# Altium PCB PCB3 - kopia.PcbDoc
Units mm, origin at the board's own origin, x right, y up, seen from the top; angles counter-clockwise.
Board outline 66 x 100 mm, 4 copper layers (Top Layer, Int1 (GND), Int2 (PWR), Bottom Layer), stack 1.369 mm thick; 75 components, 64 nets, 288 pads, 183 vias.
Unrouted connection lines stored in the file: 38.
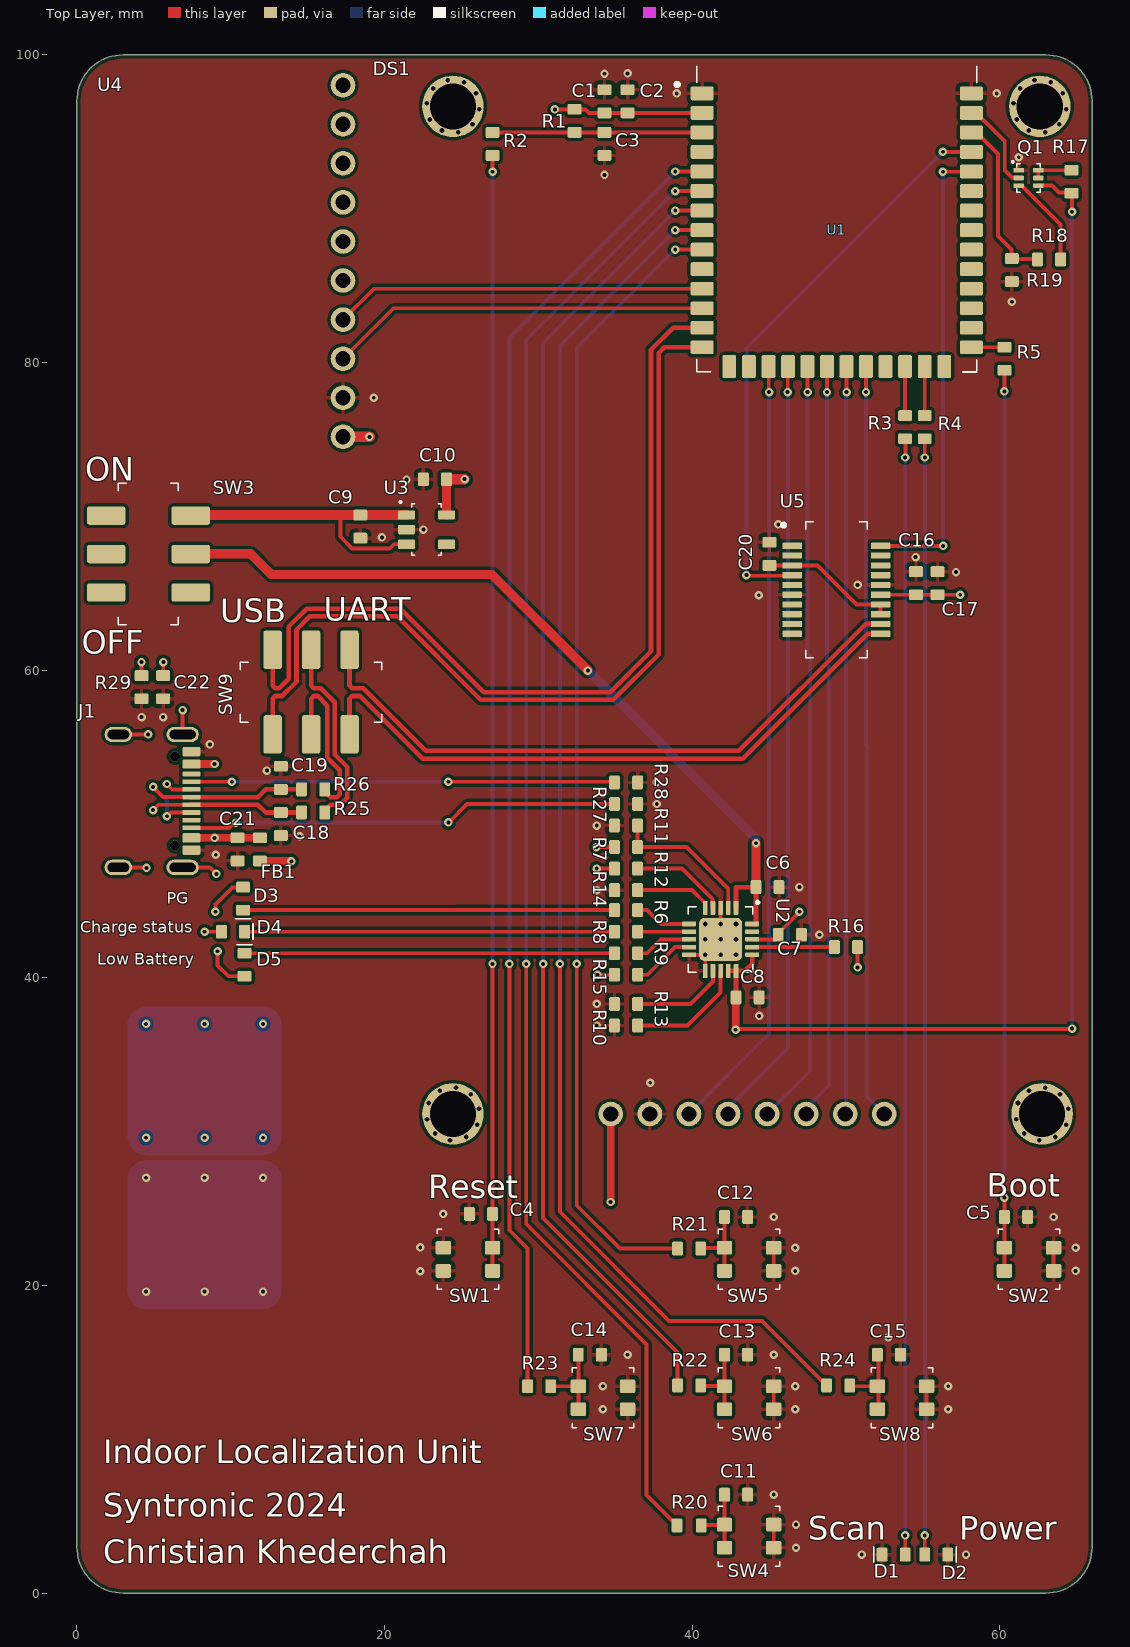
[diagram p0: Top Layer view]
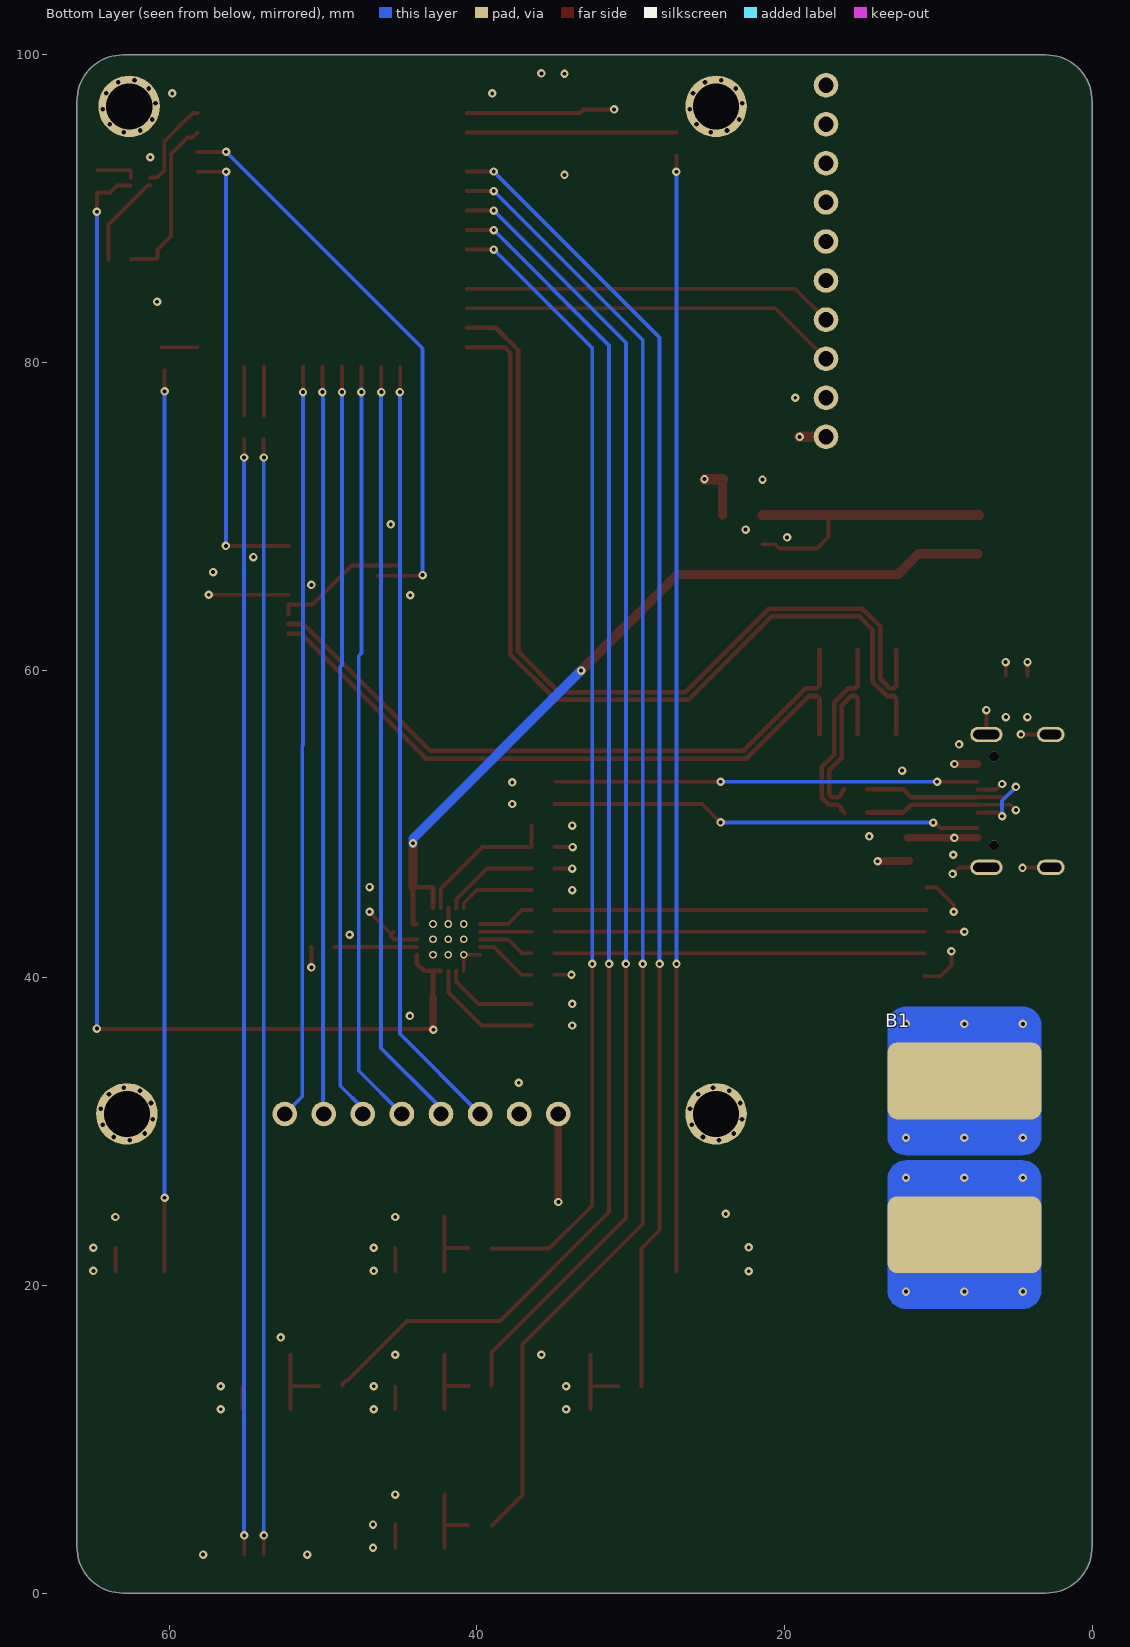
[diagram p1: Bottom Layer view, seen from below]
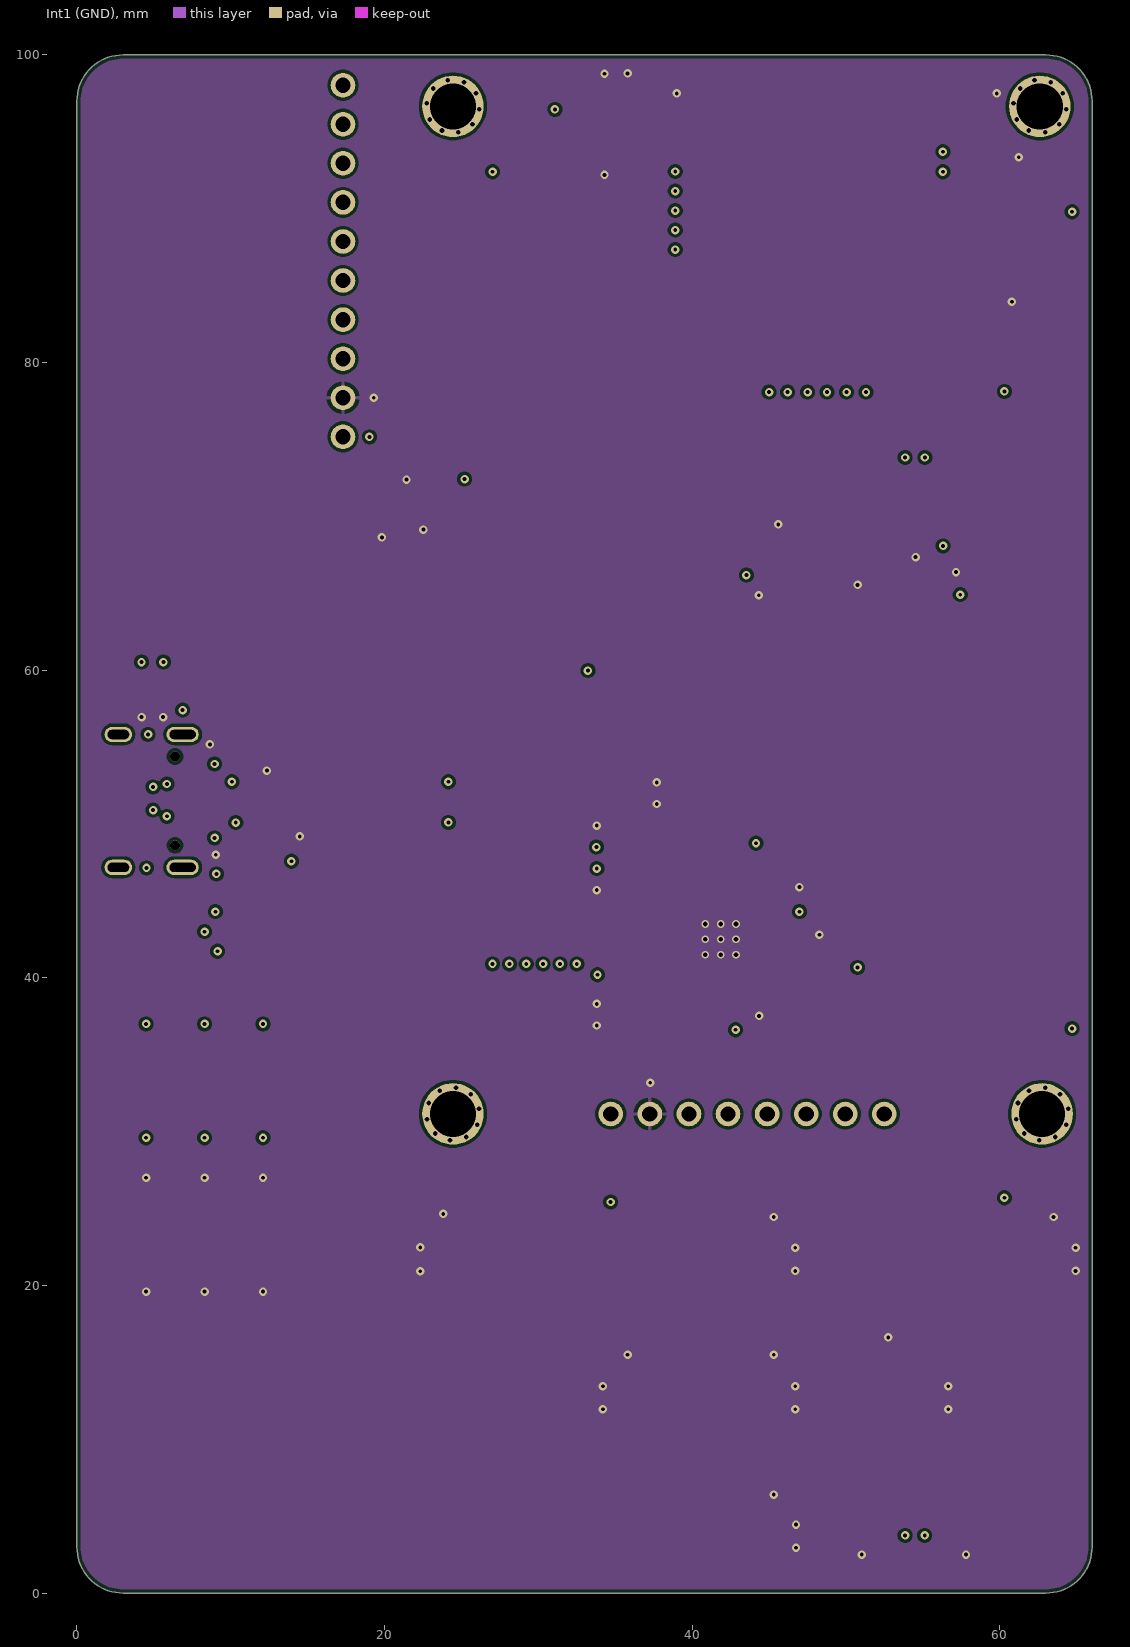
[diagram p2: Int1 (GND)]
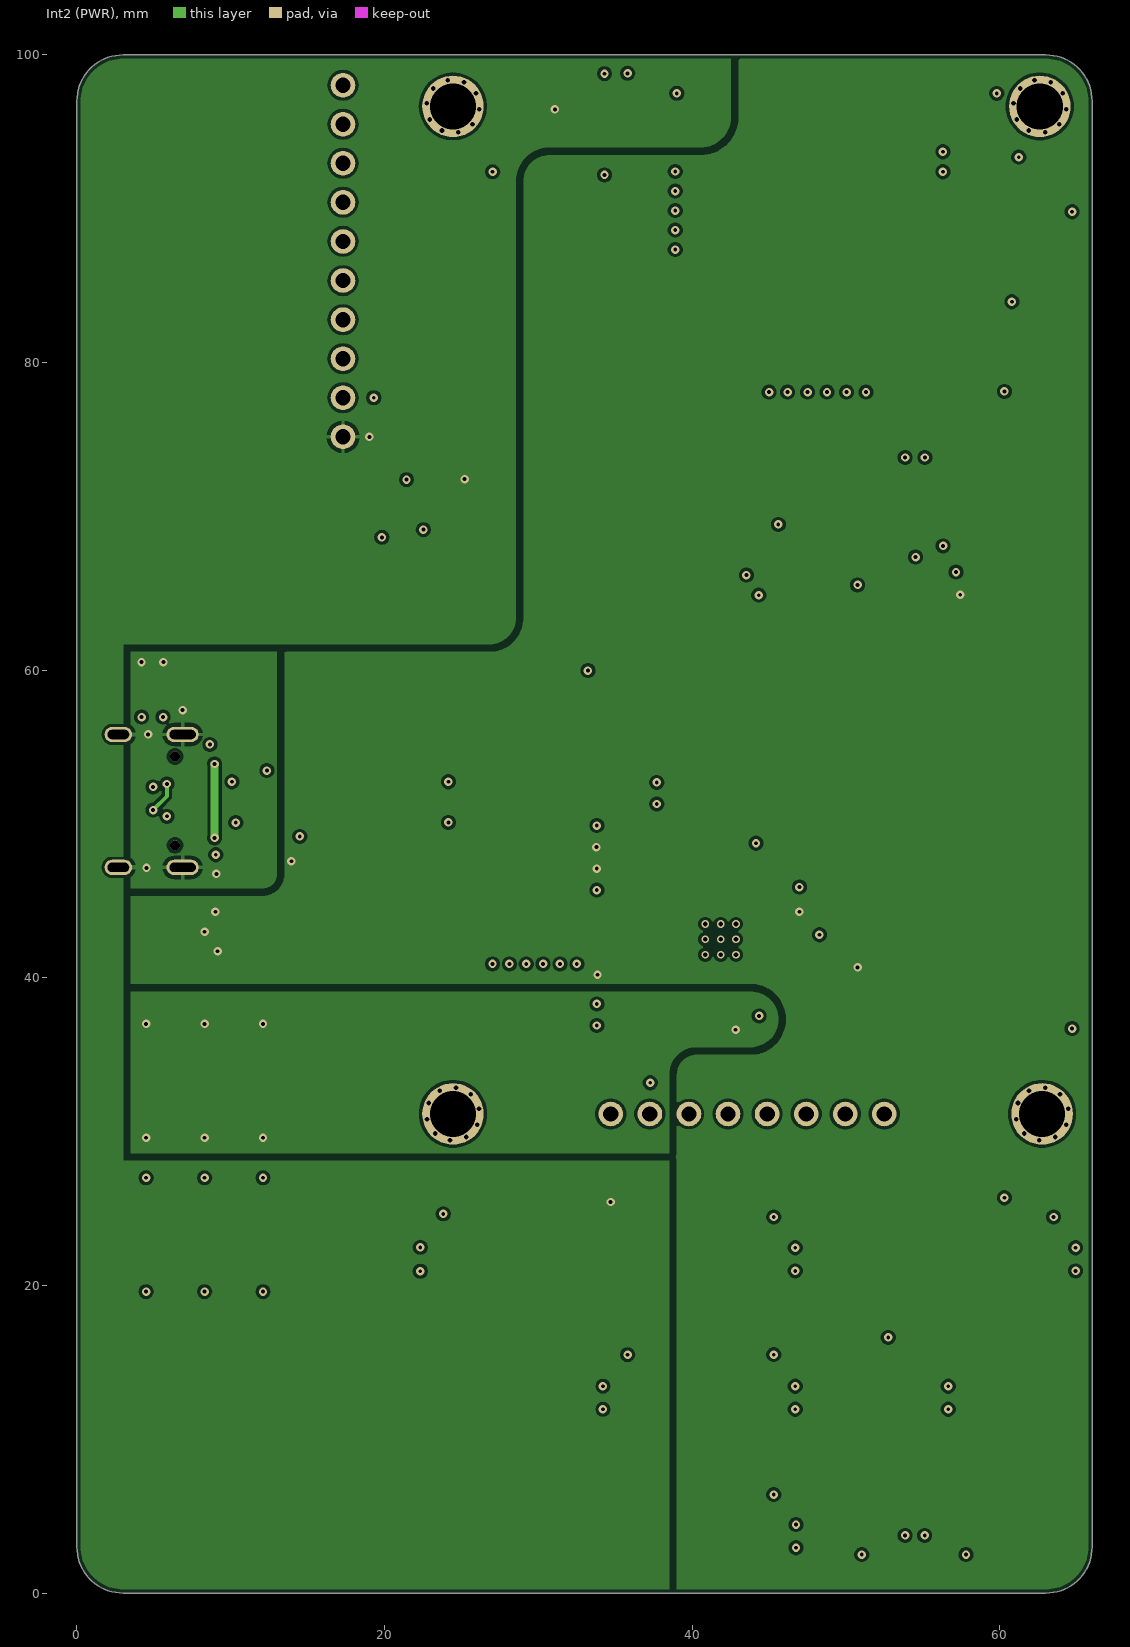
[diagram p3: Int2 (PWR)]
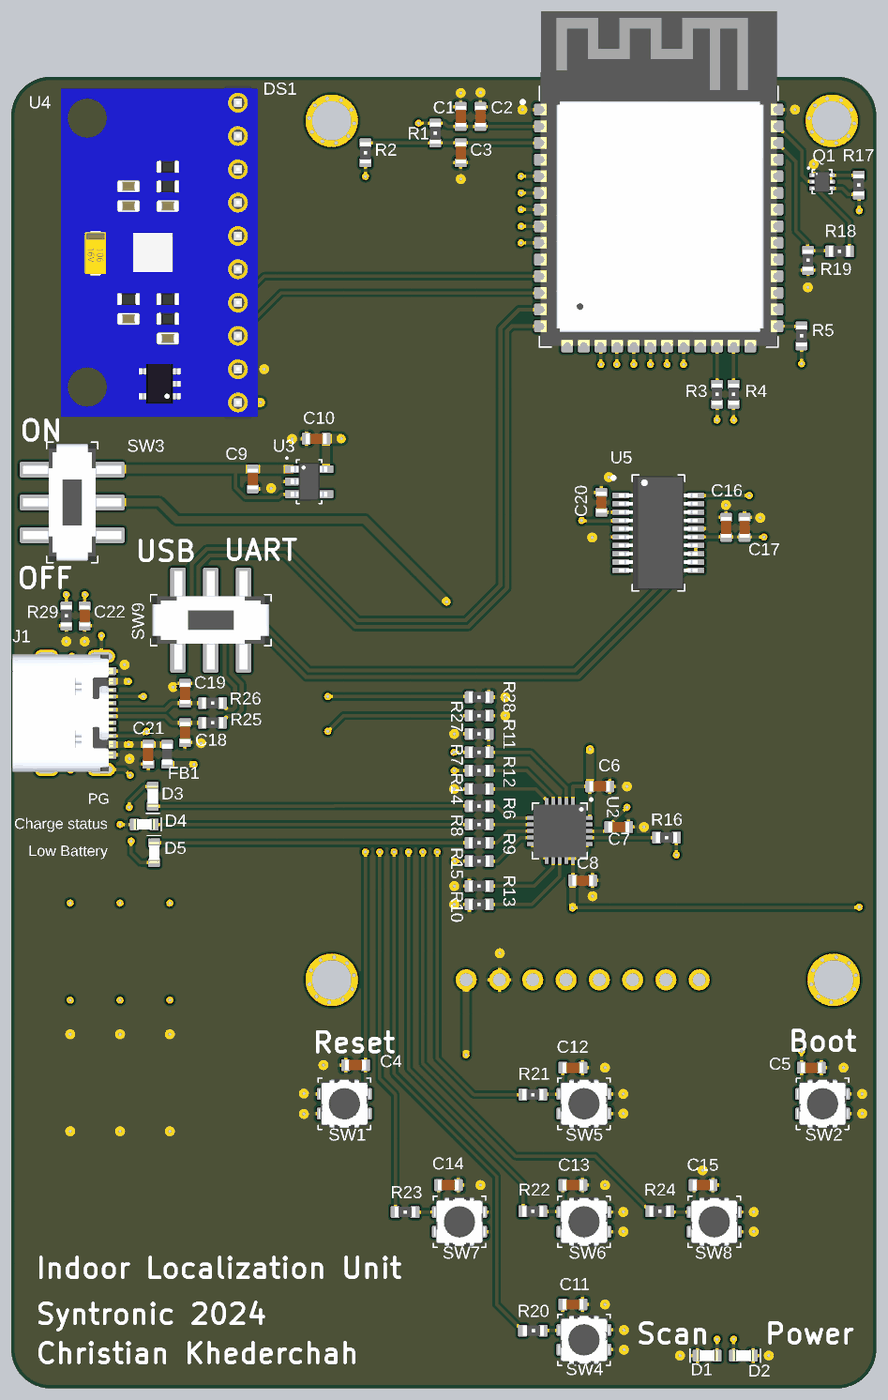
[diagram p4: 3D render of the assembled board from above, using the file's embedded part models]

## Layer stack, top to bottom
Top Solder: solder mask 0.025, SM-001, Dk 4
Top Layer: signal copper 0.035
Dielectric 1: prepreg 0.1295, PP-017, Dk 4.3
Dielectric 2: prepreg 0.1295, PP-017, Dk 4.3
Int1 (GND): signal copper 0.035
Dielectric 3: core 0.7112, Core-039, Dk 4.8
Int2 (PWR): signal copper 0.035
Dielectric 4: prepreg 0.1295, PP-017, Dk 4.3
Dielectric 5: prepreg 0.1295, PP-017, Dk 4.3
Bottom Layer: signal copper 0.035
Bottom Solder: solder mask 0.025, SM-001, Dk 4

## Board outline
0,3 0,97 cw(c3,97) 3,100 63,100 cw(c63,97) 66,97 66,3 cw(c63,3) 63,0 3,0 cw(c3,3)

## Design rules (kind name [scope] priority, off if disabled: settings)
BoardOutlineClearance [All] p1: gap=0.25 ignorepadtopadclearanceinfootprint=FALSE except(0: Arc-SplitContinuation Track-SplitContinuation SMDPad-SplitContinuation THPad-SplitContinuation Via-SplitContinuation Fill-SplitContinuation Poly-SplitContinuation Region-SplitContinuation Text-SplitContinuation)
Clearance [All] p1: gap=0.2 ignorepadtopadclearanceinfootprint=FALSE except(0.5: Fill-Fill Fill-Poly Fill-Region Poly-Poly Poly-Region Region-Region)
DiffPairsRouting [All] p1: maxlimit=0.2 minlimit=0.127 mostfreqgap=0.2 toplayer_mingap=0.2 toplayer_minwidth=0.3 toplayer_maxwidth=0.3 toplayer_prefwidth=0.3 midlayer1_maxgap=0.127 midlayer1_prefgap=0.127 midlayer1_minwidth=0.113 midlayer1_maxwidth=0.113 midlayer1_prefwidth=0.113 midlayer2_maxgap=0.127 midlayer2_prefgap=0.127 midlayer2_minwidth=0.113 midlayer2_maxwidth=0.113 midlayer2_prefwidth=0.113 bottomlayer_mingap=0.2 bottomlayer_minwidth=0.3 bottomlayer_maxwidth=0.3 bottomlayer_prefwidth=0.3 impedanceprofiledriven=TRUE impedanceprofileid={8352E104-22B4-4ABE-B9B5-B5B13E8F82C1} impedanceprofilevalue=90.000000 maxuncoupledlength=12.7
MatchedLengths MatchedLengths_USB_DiffPairs [All] p1: tolerance=0.127 checknetsindiffpair=TRUE checkdiffpairvsdiffpair=FALSE checkxsignals=FALSE checkothers=FALSE
PolygonConnect [All] p1: thpad.connectstyle=Relief thpad.reliefconductorwidth=0.254 thpad.reliefentries=4 thpad.polygonreliefangle="90 Angle" thpad.airgapwidth=0.254 smdpad.connectstyle=Relief smdpad.reliefconductorwidth=0.254 smdpad.reliefentries=4 smdpad.polygonreliefangle="90 Angle" smdpad.airgapwidth=0.254 via.connectstyle=Direct via.reliefconductorwidth=0.254 via.reliefentries=4 via.polygonreliefangle="90 Angle" via.airgapwidth=0.254
RoutingVias [All] p1: holewidth=0.25 width=0.55 viastyle="Through Hole" minholewidth=0.25 minwidth=0.55 maxholewidth=0.25 maxwidth=0.55
SolderMaskExpansion [All] p1: expansion=0.102 istentingtop=FALSE
Width [All] p1: maxlimit=1 minlimit=0.25 preferedwidth=0.25 minimp=50.000000 maximp=50.000000 favimp=50.000000
29 further rules are at their usual default settings.

## Classes and differential pairs
component class Power: B1 C6 C7 C8 C9 C10 D3 D4 D5 Q1 R6 R7 R8 R9 R10 R11 R12 R13 R14 R15 R16 R17 R18 R19 SW3 U2 U3
component class MCU: 2 C1 C2 C3 C4 C5 D1 D2 R1 R2 R3 R4 R5 SW1 SW2 U1
component class COM: C16 C17 C18 C19 C20 C21 C22 FB1 J1 R25 R26 R27 R28 R29 SW9 U5
component class Peripherals: C11 C12 C13 C14 C15 DS1 R20 R21 R22 R23 R24 SW4 SW5 SW6 SW7 SW8 U4
differential pair C: +C_p -C_n
differential pair A: +A_p -A_n
differential pair B: +B_p -B_n
differential pair D: +D_p -D_n

## Components (designator, comment, footprint, x,y, rotation, side; value= is the part's Value field where it differs from the comment)
B1 "1200mAh" battery 8.3,28.3 r270 bottom
C1 "22 μF" "Capacitor 0603" 34.3,96.98 r270 top
C2 "0.1 μF" "Capacitor 0603" 35.8,96.98 r270 top
C3 "1 μF" "Capacitor 0603" 34.3,94.21 r90 top
C4 "0.1 μF" "Capacitor 0603" 26.27,24.65 r0 top
C5 "0.1 μF" "Capacitor 0603" 61.05,24.45 r0 top
C6 "4.7 μF" "Capacitor 0603" 44.9,45.9 r180 top
C7 "10 μF" "Capacitor 0603" 46.35,42.8 r180 top
C8 "4.7 μF" "Capacitor 0603" 43.6,38.725 r0 top
C9 "4.7 μF" "Capacitor 0603" 18.428,69.335 r90 top
C10 "4.7 μF" "Capacitor 0603" 23.278,72.41 r180 top
C11 "0.1 μF" "Capacitor 0603" 42.85,6.4 r180 top
C12 "0.1 μF" "Capacitor 0603" 42.85,24.45 r180 top
C13 "0.1 μF" "Capacitor 0603" 42.85,15.5 r180 top
C14 "0.1 μF" "Capacitor 0603" 33.35,15.5 r180 top
C15 "0.1 μF" "Capacitor 0603" 52.79,15.5 r180 top
C16 "0.1 μF" "Capacitor 0603" 54.55,65.658 r270 top
C17 "4.7 μF" "Capacitor 0603" 55.95,65.658 r270 top
C18 "47 pF" "Capacitor 0603" 13.26,50 r90 top
C19 "47 pF" "Capacitor 0603" 13.26,53 r270 top
C20 "0.1 μF" "Capacitor 0603" 45.025,67.563 r270 top
C21 "10 nF" "Capacitor 0603" 10.45,48.35 r90 top
C22 "4.7 μF" "Capacitor 0603" 5.602,58.898 r90 top
D1 "Blue" "LED 0603" 53.095,2.5 r180 top
D2 "Green" "LED 0603" 55.865,2.5 r0 top
D3 "Green" "LED 0603" 10.8,45.15 r270 top
D4 "Blue" "LED 0603" 10.15,43 r0 top
D5 "Red" "LED 0603" 10.9,40.85 r90 top
DS1 "FT231XS-R" Screen 43.6,63.9 r90 top locked
FB1 "0.6kΩ" "Ferrite Bead 0603" 11.9,48.35 r270 top
J1 "USB4105-GF-A" USB4105-GF-A 7.45,51.5 r270 top
Q1 "DMC2400UV-7" "MOSFET N/P-CH" 61.865,92 r270 top
R1 "10kΩ" "Resistor 0603"#1 32.35,95.71 r270 top
R2 "0 Ω" "Resistor 0603"#1 27.025,94.21 r90 top
R3 "50 Ω" "Resistor 0603"#1 53.845,75.8 r90 top
R4 "50 Ω" "Resistor 0603"#1 55.115,75.8 r270 top
R5 "0 Ω" "Resistor 0603"#1 60.3,80.25 r270 top
R6 "0.47kΩ" "Resistor 0603"#1 35.7,44.4 r0 top
R7 "330kΩ" "Resistor 0603"#1 35.7,48.5 r180 top
R8 "0.47kΩ" "Resistor 0603"#1 35.7,43 r0 top
R9 "0.47kΩ" "Resistor 0603"#1 35.7,41.6 r0 top
R10 "4.7kΩ" "Resistor 0603"#1 35.7,36.9 r180 top
R11 "110kΩ" "Resistor 0603"#1 35.7,49.9 r0 top
R12 "4.7kΩ" "Resistor 0603"#1 35.7,47.1 r0 top
R13 "100kΩ" "Resistor 0603"#1 35.7,38.3 r180 top
R14 "10kΩ" "Thermistor 0603" 35.7,45.7 r180 top
R15 "4.7kΩ" "Resistor 0603"#1 35.7,40.2 r0 top
R16 "4.7kΩ" "Resistor 0603"#1 50,42 r180 top
R17 "110kΩ" "Resistor 0603"#1 64.665,91.75 r90 top
R18 "30kΩ" "Resistor 0603"#1 63.2,86.7 r0 top
R19 "110kΩ" "Resistor 0603"#1 60.781,86.01 r90 top
R20 "0 Ω" "Resistor 0603"#2 39.84,4.4 r180 top
R21 "0 Ω" "Resistor 0603"#1 39.8,22.4 r180 top
R22 "0 Ω" "Resistor 0603"#1 39.8,13.5 r180 top
R23 "0 Ω" "Resistor 0603"#1 30.05,13.45 r180 top
R24 "0 Ω" "Resistor 0603"#1 49.49,13.5 r180 top
R25 "27Ω" "Resistor 0603"#1 15.36,50.75 r0 top
R26 "27Ω" "Resistor 0603"#1 15.36,52.25 r0 top
R27 "5.1kΩ" "Resistor 0603"#1 35.7,51.3 r180 top
R28 "5.1kΩ" "Resistor 0603"#1 35.7,52.7 r180 top
R29 "100kΩ" "Resistor 0603"#1 4.202,58.898 r90 top
SW1 "R-667843" R-667843 25.42,21.7 r0 top
SW2 "R-667843" R-667843 61.9,21.7 r0 top
SW3 "JS202011SCQN" JS202011SCQN 4.65,67.55 r270 top
SW4 "R-667843" R-667843 43.7,3.7 r180 top
SW5 "R-667843" R-667843 43.7,21.7 r180 top
SW6 "R-667843" R-667843 43.7,12.7 r180 top
SW7 "R-667843" R-667843 34.2,12.7 r180 top
SW8 "R-667843" R-667843 53.64,12.7 r180 top
SW9 "JS202011SCQN" JS202011SCQN 15.225,58.575 r180 top
U1 "ESP32-S3-WROOM-1-N16" ESP32-C3-WROOM-1 49.4,97.5 r0 top
U2 "MCP73871T-2CCI/ML" MCP73871 41.85,42.5 r270 top
U3 "TLV75533PDBVR" TLV75533PDBVR 22.728,69.135 r0 top
U4 "YUMILI1otydzvg2c" GY-9250 17.3,86.6 r180 top
U5 "FT231XS-R" FT231XS-R 49.375,65.225 r270 top

## Footprints (in the part's own frame and the unit in brackets; to place one, negate y for a bottom-side part, rotate by r counter-clockwise, add the part's x,y. Pads: shape width x height; smd on the part's side, far side on the other; paste and mask are expansions set on the pad)
battery [mm]
  rrect25% 5x10 smd: +(-5,0) -(5,0)
"Capacitor 0603" [mm] "Capacitor0603"
  rrect25% 0.7x0.9 smd: A(-0.75,0) B(0.75,0)
  body extent -0.8,-0.4 0.8,0.4, height 0.9
ESP32-C3-WROOM-1 [mm] "MCU"
  rrect25% 1.5x0.9 smd: 1(-8.75,0) 2(-8.75,-1.27) 3(-8.75,-2.54) 4(-8.75,-3.81) 5(-8.75,-5.08) 6(-8.75,-6.35) 7(-8.75,-7.62) 8(-8.75,-8.89) 9(-8.75,-10.16) 10(-8.75,-11.43) 11(-8.75,-12.7) 12(-8.75,-13.97) 13(-8.75,-15.24) 14(-8.75,-16.51) 27(8.75,-16.51) 28(8.75,-15.24) 29(8.75,-13.97) 30(8.75,-12.7) 31(8.75,-11.43) 32(8.75,-10.16) 33(8.75,-8.89) 34(8.75,-7.62) 35(8.75,-6.35) 36(8.75,-5.08) 37(8.75,-3.81) 38(8.75,-2.54) 39(8.75,-1.27) 40(8.75,0)
  rrect25% 0.9x1.5 smd: 15(-6.985,-17.757) 16(-5.715,-17.757) 17(-4.445,-17.757) 18(-3.175,-17.757) 19(-1.905,-17.757) 20(-0.635,-17.757) 21(0.635,-17.757) 22(1.905,-17.757) 23(3.175,-17.757) 24(4.445,-17.757) 25(5.715,-17.757) 26(6.985,-17.757)
  silkscreen extent -10.49,-18.12 9.1,1.78, body extent -9,-18.01 9,7.49, height 3.25
"Ferrite Bead 0603" [mm] "Ferrite Bead 0603"
  rrect25% 0.7x0.9 smd: A(-0.75,0) B(0.75,0)
  body extent -0.8,-0.4 0.8,0.4, height 0.95
FT231XS-R [mil] "USB to UART Bridge"
  rrect25% 16x50 smd: 1(-112.5,-113) 2(-87.5,-113) 3(-62.5,-113) 4(-37.5,-113) 5(-12.5,-113) 6(12.5,-113) 7(37.5,-113) 8(62.5,-113) 9(87.5,-113) 10(112.5,-113) 11(112.5,113) 12(87.5,113) 13(62.5,113) 14(37.5,113) 15(12.5,113) 16(-12.5,113) 17(-37.5,113) 18(-62.5,113) 19(-87.5,113) 20(-112.5,113)
  silkscreen extent -174,-139 174,79, body extent -171,-118 171,118, height 69
GY-9250 [mm] "IMU"
  round 1.6 hole 1: 1(0,11.43) 2(0,8.89) 3(0,6.35) 4(0,3.81) 5(0,1.27) 6(0,-1.27) 7(0,-3.81) 8(0,-6.35) 9(0,-8.89) 10(0,-11.43)
  body extent -1.5,-12.7 13.5,12.7, height 6.1
JS202011SCQN [mm] "SWITCH SLIDE DPDT 300MA 6V"
  rrect25% 1.2x2.5 smd: 1(-2.5,-2.75) 2(0,-2.75) 3(2.5,-2.75) 4(-2.5,2.75) 5(0,2.75) 6(2.5,2.75)
  silkscreen extent -4.6,-1.95 4.6,1.95, body extent -4.5,-3.75 4.5,3.75, height 5.51
"LED 0603" [mm] "Resistor 0603"
  rrect25% 0.7x0.9 smd: A(-0.75,0) B(0.75,0)
  silkscreen extent 1.3,-0.5 1.3,0.5, body extent -0.8,-0.4 0.8,0.4, height 0.35
MCP73871 [mm]
  rrect25% 0.9x0.3 smd: 1(-2.05,1) 2(-2.05,0.5) 3(-2.05,0) 4(-2.05,-0.5) 5(-2.05,-1) 11(2.05,-1) 12(2.05,-0.5) 13(2.05,0) 14(2.05,0.5) 15(2.05,1)
  rrect25% 0.3x0.9 smd: 6(-1,-2.05) 7(-0.5,-2.05) 8(0,-2.05) 9(0.5,-2.05) 10(1,-2.05) 16(1,2.05) 17(0.5,2.05) 18(0,2.05) 19(-0.5,2.05) 20(-1,2.05)
  rrect25% 2.8x2.8 smd: 21(0,0)
  silkscreen extent -2.45,-2.1 2.12,2.45, body extent -2,-2 2,2, height 1
"MOSFET N/P-CH" [mm] "MOSFET N/P-CH"
  rrect25% 0.3x0.67 smd: 1(-0.5,-0.635) 2(0,-0.635) 3(0.5,-0.635) 4(-0.5,0.635) 5(0,0.635) 6(0.5,0.635)
  silkscreen extent -1.05,-1.03 0.91,0.76, body extent -0.8,-0.8 0.8,0.8, height 0.6
R-667843 [mm] "SWITCH TACTILE SPST-NO 0.05A 12V"
  rrect25% 1x0.9 smd: A(-1.6,-0.75) A(-1.6,0.75) B(1.6,-0.75) B(1.6,0.75)
  silkscreen extent -2,-1.95 2,1.95, body extent -1.95,-1.9 1.95,1.9, height 1.5
"Resistor 0603"#1 [mm] "Resistor 0603"
  rrect25% 0.7x0.9 smd: A(-0.75,0) B(0.75,0)
  body extent -0.8,-0.4 0.8,0.4, height 0.55
"Resistor 0603"#2 [mm] "Resistor 0603"
  rrect25% 0.7x0.9 smd: A(-0.75,0) B(0.83,0)
  body extent -0.8,-0.4 0.8,0.4, height 0.55
Screen [mm]
  round 1.6 hole 1: 1(-32.75,8.89) 2(-32.75,6.35) 3(-32.75,3.81) 4(-32.75,1.27) 5(-32.75,-1.27) 6(-32.75,-3.81) 7(-32.75,-6.35) 8(-32.75,-8.89)
  round 4 hole 3: X(-32.75,-19.15) X(-32.75,19.15) X(32.75,-19) X(32.75,19.15)
  body extent -35.25,-21.65 35.25,21.65, height 7
"Thermistor 0603" [mm] "Thermistor 0603"
  rrect25% 0.7x0.9 smd: A(-0.75,0) B(0.75,0)
  body extent -0.8,-0.4 0.8,0.4, height 0.9
TLV75533PDBVR [mm] "IC REG LINEAR 3.3V 500MA SOT23-5"
  rrect25% 1.1x0.6 smd: 1(-1.3,0.95) 2(-1.3,0) 3(-1.3,-0.95) 4(1.3,-0.95) 5(1.3,0.95)
  silkscreen extent -1.7,-1.67 0.96,1.8, body extent -1.4,-1.45 1.4,1.45, height 1.45
USB4105-GF-A [mm] "CONN RCPT TYPE C 6P SMD RA"
  round 0.65 hole 0.65 unplated: 36(-2.89,-1.075) 36(2.89,-1.075)
  rrect25% 0.6x1.15 smd: A1(-3.2,0) A4(-2.4,0) B1(3.2,0) B4(2.4,0)
  rrect25% 0.3x1.15 smd: A5(-1.25,0) A6(-0.25,0) A7(0.25,0) A8(1.25,0) B5(1.75,0) B6(0.75,0) B7(-0.75,0) B8(-1.75,0)
  oval 1x2.1 hole 0.6 slot 1.7 at 90 deg: SHELL(-4.32,-0.575) SHELL(4.32,-0.575)
  oval 1x1.8 hole 0.6 slot 1.4 at 90 deg: SHELL(-4.32,-4.755) SHELL(4.32,-4.755)
  body extent -4.47,-7.35 4.47,0.36, height 3.31

## Part data
B1: library part Battery, "Lipobatteri - 103040 - 1.200 mAh", Manufacturer=batterikungen, Manufacturer Part Number=103040, Supplier Part Number 1=827-016, Supplier 1=Batterikungen
C1: library part "22 μF 0603", "Capacitor 22 μF", Manufacturer="Murata Electronics", Manufacturer Part Number=GRM188R60G226MEA0D, Supplier Part Number 1=490-5526-1-ND, Supplier 1=Digikey
C2 C4 C5 C11 C12 C13 C14 C15 C16 C20: library part "0.1 μF 0603", "Capacitor 0.1 μF", Manufacturer="Samsung Electro-Mechanics", Manufacturer Part Number=CL10B104KB8NNWC, Supplier Part Number 1=1276-1935-1-ND, Supplier 1=Digikey
C3: library part "1 μF 0603", "Capacitor 1 μF", Manufacturer="Samsung Electro-Mechanics", Manufacturer Part Number=CL10A105KA8NNNC, Supplier Part Number 1=1276-1102-1-ND, Supplier 1=Digikey
C6 C8 C9 C10 C17 C22: library part "4,7 μF 0603", "Capacitor 4.7 μF", Manufacturer="Samsung Electro-Mechanics", Manufacturer Part Number=CL10A475KP8NNNC, Supplier Part Number 1=1276-1044-1-ND, Supplier 1=Digikey
C7: library part "10 μF 0603", "Capacitor 10 μF", Manufacturer="Samsung Electro-Mechanics", Manufacturer Part Number=CL10A106MQ8NNNC, Supplier Part Number 1=1276-1119-1-ND, Supplier 1=Digikey
C18 C19: library part "47 pF 0603", "Capacitor 47 pF", Manufacturer="Walsin Technology Corporation", Manufacturer Part Number=0603N470J500CT, Supplier Part Number 1=1292-1528-1-ND, Supplier 1=Digikey
C21: library part "10 nF 0603", "Capacitor 10 nF", Manufacturer="Samsung Electro-Mechanics", Manufacturer Part Number=CL10B103KB8NNNC, Supplier Part Number 1=1276-1009-1-ND, Supplier 1=Digikey
D1 D4: library part D.Blue, "Diode Blue", Manufacturer="Lite-On Inc.", Manufacturer Part Number=LTST-C193TBKT-5A, Supplier Part Number 1=160-1827-1-ND, Supplier 1=Digikey
D2 D3: library part D.Green, "Diode Green", Manufacturer="Lumex Opto/Components Inc.", Manufacturer Part Number=SML-LXFT0603GC-TR, Supplier Part Number 1=67-SML-LXFT0603GC-TRCT-ND, Supplier 1=Digikey
D5: library part D.Red, "Diode Red", Manufacturer="Lite-On Inc.", Manufacturer Part Number=LTST-C190KRKT, Supplier Part Number 1=160-1436-1-ND, Supplier 1=Digikey
DS1: library part LCD-screen, "240×320, General 2.4inch LCD Display Module, 65K RGB", Manufacturer="FTDI, Future Technology Devices International Ltd", Supplier Part Number 1=768-1129-1-ND, Manufacturer Part Number=FT231XS-R, Supplier 1=Waveshare
FB1: library part "FB 0.6 kΩ 0603", "Ferrite Bead 600 Ω", Manufacturer="Murata Electronics", Manufacturer Part Number=BLM18AG601SN1D, Supplier Part Number 1=490-1014-1-ND, Supplier 1=Digikey
J1: "CONN RCPT TYPE C 6P SMD RA", Manufacturer=GCT, Supplier Part Number 1=2073-USB4105-GF-ACT-ND, Manufacturer Part Number=USB4105-GF-A, Supplier 1=Digikey
Q1: "MOSFET N/P-CH 20V SOT563", Manufacturer="Diodes Incorporated", Supplier Part Number 1=DMC2400UV-7DICT-ND, Manufacturer Part Number=DMC2400UV-7, Supplier 1=Digikey
R1: library part "10 kΩ 0603", "Resistor 10000 Ω", Manufacturer="Stackpole Electronics Inc", Manufacturer Part Number=RMCF0603FT10K0, Supplier Part Number 1=RMCF0603FT10K0CT-ND, Supplier 1=Digikey
R2 R5 R20 R21 R22 R23 R24: library part "0 Ω 0603", "Resistor 0 Ω", Manufacturer="Stackpole Electronics Inc", Manufacturer Part Number=RMCF0603ZT0R00, Supplier Part Number 1=RMCF0603ZT0R00CT-ND, Supplier 1=Digikey
R3 R4: library part "0.05 kΩ 0603", "Resistor 50 Ω", Manufacturer="Vishay Dale", Manufacturer Part Number=CRCW060350R0FKEA, Supplier Part Number 1=541-3318-1-ND, Supplier 1=Digikey
R6 R8 R9: library part "0.47 kΩ 0603", "Resistor 470 Ω", Manufacturer="Stackpole Electronics Inc", Manufacturer Part Number=RMCF0603FT470R, Supplier Part Number 1=RMCF0603FT470RCT-ND, Supplier 1=Digikey
R7: library part "330 kΩ 0603", "Resistor 330000 Ω", Manufacturer=YAGEO, Manufacturer Part Number=RC0603JR-07330KL, Supplier Part Number 1=311-330KGRCT-ND, Supplier 1=Digikey
R10 R12 R15 R16: library part "4.7 kΩ 0603", "Resistor 4700 Ω", Manufacturer="Stackpole Electronics Inc", Manufacturer Part Number=RMCF0603FT4K70, Supplier Part Number 1=RMCF0603FT4K70CT-ND, Supplier 1=Digikey
R11 R17 R19: library part "110 kΩ 0603", "Resistor 110000 Ω", Manufacturer="Stackpole Electronics Inc", Manufacturer Part Number=RMCF0603FT110K, Supplier Part Number 1=RMCF0603FT110KCT-ND, Supplier 1=Digikey
R13 R29: library part "100 kΩ 0603", "Resistor 100000 Ω", Manufacturer="Stackpole Electronics Inc", Manufacturer Part Number=RMCF0603FT100K, Supplier Part Number 1=RMCF0603FT100KCT-ND, Supplier 1=Digikey
R14: library part "NTC 10 KΩ 0603", "Thermistor 10000 Ω", Manufacturer="Panasonic Electronic Components", Manufacturer Part Number=ERT-J1VR103J, Supplier Part Number 1=P10547CT-ND, Supplier 1=Digikey
R18: library part "30 kΩ 0603", "Resistor 30000 Ω", Manufacturer=YAGEO, Manufacturer Part Number=RC0603FR-0730KL, Supplier Part Number 1=311-30.0KHRCT-ND, Supplier 1=Digikey
R25 R26: library part "27 Ω 0603", "Resistor 27 Ω", Manufacturer="Stackpole Electronics Inc", Manufacturer Part Number=RMCF0603FT27R0, Supplier Part Number 1=RMCF0603FT27R0CT-ND, Supplier 1=Digikey
R27 R28: library part "5.1 kΩ 0603", "Resistor 5100 Ω", Manufacturer="Stackpole Electronics IncStackpole Electronics Inc", Manufacturer Part Number=RMCF0603FT5K10, Supplier Part Number 1=RMCF0603FT5K10CT-ND, Supplier 1=Digikey
SW1 SW2 SW4 SW5 SW6 SW7 SW8: "SWITCH TACTILE SPST-NO 0.05A 12V", Manufacturer="Mitsumi Electric Company Ltd", Supplier Part Number 1=2508-R-667843CT-ND, Manufacturer Part Number=R-667843, Supplier 1=Digikey
SW3 SW9: "SWITCH SLIDE DPDT 300MA 6V", Manufacturer=C&K, Supplier Part Number 1=401-2002-1-ND, Manufacturer Part Number=JS202011SCQN, Supplier 1=Digikey
U1: "RF TXRX MODULE BT PCB TRACE SMD", Manufacturer="Espressif Systems", Supplier Part Number 1=1965-ESP32-S3-WROOM-1-N16CT-ND, Manufacturer Part Number=ESP32-S3-WROOM-1-N16, Supplier 1=Digikey
U2: library part MCP73871, "IC BATT CHG LI-ION 1CELL 20QFN", Manufacturer="Microchip Technology", Supplier Part Number 1=MCP73871T-2CCI/MLDKR-ND, Manufacturer Part Number=MCP73871T-2CCI/ML, Supplier 1=Digikey
U3: "IC REG LINEAR 3.3V 500MA SOT23-5", Manufacturer="Texas Instruments", Supplier Part Number 1=296-50411-1-ND, Manufacturer Part Number=TLV75533PDBVR, Supplier 1=Digikey
U4: library part GY-9250, "YUMILI Gyroskopmodul MPU-9250 GY-9250 9-axel 16-bitars", Manufacturer=YUMILI, Supplier Part Number 1=B09XZQNQBV, Manufacturer Part Number=YUMILI1otydzvg2c, Supplier 1=Amazon
U5: library part FT231XS-R_1, "IC USB SERIAL FULL UART 20SSOP", Manufacturer="FTDI, Future Technology Devices International Ltd", Supplier Part Number 1=768-1129-1-ND, Manufacturer Part Number=FT231XS-R, Supplier 1=Digikey

## Via types
v1: diameter 0.55, hole 0.25, Top Layer to Bottom Layer, 130 vias
v2: diameter 0.4, hole 0.3, Top Layer to Bottom Layer, 44 vias
v3: diameter 0.5, hole 0.3, Top Layer to Bottom Layer, 9 vias

## Nets (pads, with @x,y where several pads share a name; then routed paths per layer and width w, separated by ;. In a path a pad name is that pad's centre, name@x,y a point inside that pad or via, vN(x,y) a via of type N, cw(c..) or ccw(c..) an arc to the next point about the centre after c; other vN are vias at no path point)
+3V3: C1.B C2.B C10.A DS1.1 R1.A U1.2 U3.5 U4.1 | length 20.6
  Top Layer w0.25: v1(31.075,96.46) 33.065,96.46 33.295,96.23 C2.B U1.2
  Top Layer w0.5: v1@34.71,25.435 DS1.1
  Top Layer w0.6: U3.5 C10.A ; v1@25.185,72.41 v1(25.2,72.425)
  Top Layer w0.7: U4.1 v1(19.02,75.17) ; C10.A v1@25.185,72.41
  other v1: 34.7,25.425
A_n: SW9.1 U5.12 | length 42
  Top Layer w0.3: SW9.1 17.725,59.001 17.901,58.825 18.607,58.825 22.682,54.75 43.037,54.75 51.29,63.003 U5.12
A_p: SW9.4 U5.11 | length 42
  Top Layer w0.3: SW9.4 17.725,58.149 17.901,58.325 18.4,58.325 22.475,54.25 43.282,54.25 51.412,62.38 U5.11@52.233,62.38
B_n: SW9.3 U1.13 | length 58
  Top Layer w0.3: SW9.3 12.725,59.001 12.901,58.825 13.149,58.825 13.775,59.451 13.775,62.839 14.936,64 21.025,64 26.45,58.575 34.675,58.575 37.325,61.225 37.325,80.825 38.76,82.26 U1.13
B_p: SW9.6 U1.14 | length 57.7
  Top Layer w0.3: SW9.6 12.725,58.149 12.901,58.325 13.356,58.325 14.275,59.244 14.275,62.632 15.143,63.5 20.818,63.5 26.096,58.221 26.243,58.075 34.882,58.075 37.825,61.018 37.825,80.618 38.197,80.99 39.286,80.99 U1.14
C_n: R25.B SW9.2 | length 12.8
  Top Layer w0.3: SW9.2 15.225,59.001 15.401,58.825 15.856,58.825 16.775,57.906 16.775,54.518 17.586,53.707 17.586,51.719 17.117,51.25 16.486,51.25 16.31,51.074 16.31,50.95 R25.B
C_p: R26.B SW9.5 | length 11.1
  Top Layer w0.3: SW9.5 15.225,58.149 15.401,58.325 15.649,58.325 16.275,57.699 16.275,54.311 17.086,53.5 17.086,51.926 16.91,51.75 16.486,51.75 16.31,51.926 16.31,52.05 R26.B
D_n: C18.B J1.A7 J1.B7 R25.A | length 13.8
  Top Layer w0.25: v1(4.95,50.9) 5.3,51.25 J1.A7 ; v1(5.85,52.6) 6.2,52.25 J1.B7
  Top Layer w0.3: J1.A7 11.766,51.25 12.266,50.75 R25.A
  Int2 (PWR) w0.25: v1(4.95,50.9) 5.85,51.8 v1(5.85,52.6)
D_p: C19.B J1.A6 J1.B6 R26.A | length 14.1
  Top Layer w0.25: v1(4.95,52.41) 5.61,51.75 J1.A6 ; v1(5.85,50.5) 6.1,50.75 J1.B6
  Top Layer w0.3: J1.A6 11.775,51.75 12.275,52.25 R26.A
  Bottom Layer w0.25: v1(4.95,52.41) 5.85,51.51 v1(5.85,50.5)
GND: B1.- C1.A C2.A C3.A C4.A C5.B C6.A C7.A C8.B C9.A C10.B C11.A C12.A C13.A C14.A C15.A C16.A C17.A C18.A C19.A C20.A C21.A C22.A D1.B D2.B DS1.2 J1.A1 J1.B1 Q1.1 R10.B R11.A R13.B R14.B R19.A R27.A R28.A R29.A SW1.A SW2.B SW4.A SW5.A SW6.A SW7.A SW8.A U1.1 U1.40 U2.3 U2.10 U2.11 U2.21 U3.2 U4.2 U5.6 U5.16 | length 10.8
  Top Layer w0.25: v1@8.563,55.175 v1(8.644,55.175) ; DS1.2 DS1.2@37.275,31.175 ; U2.10 v3(40.85,41.5) U2.11 ; v3(41.85,43.5) U2.3 ; SW4.A@45.3,2.95 SW4.A@45.3,4.45 ; SW6.A@45.3,11.95 SW6.A@45.3,13.45 ; SW5.A@45.3,20.95 SW5.A@45.3,22.45 ; SW8.A@55.24,11.95 SW8.A@55.24,13.45 ; SW2.B@63.5,20.95 SW2.B@63.5,22.45
  other v1: 51.025,2.5 57.8,2.5 46.75,2.95 46.75,4.45 45.3,6.4 34.2,11.95 46.7,11.95 56.65,11.95 34.2,13.45 46.7,13.45 56.65,13.45 35.8,15.5 45.3,15.5 52.75,16.625 4.5,19.6 8.3,19.6 12.1,19.6 22.325,20.925 46.7,20.95 64.925,20.95 46.7,22.45 64.925,22.45 22.325,22.475 45.3,24.45 63.5,24.45 23.82,24.65 4.5,27 8.3,27 12.1,27 37.275,33.175 33.8,36.9 44.355,37.525 33.8,38.3 48.275,42.8 33.8,45.7 46.975,45.9 9.025,48 14.485,49.196 33.8,49.9 37.7,51.3 37.7,52.7 12.35,53.475 4.202,56.948 5.602,56.948 44.325,64.875 50.75,65.543 57.15,66.375 54.525,67.35 19.828,68.635 22.528,69.135 45.6,69.475 21.428,72.385 19.3,77.71 60.781,83.95 34.3,92.2 61.23,93.35 39,97.5 59.8,97.5 34.3,98.775 35.8,98.8
  other v3: 41.85,41.5 42.85,41.5 40.85,42.5 41.85,42.5 42.85,42.5 40.85,43.5 42.85,43.5
NetC3_B: C3.B R1.B R2.B U1.3 | length 13.6
  Top Layer w0.25: R2.B C3.B U1.3
NetC4_B: C4.B R2.A SW1.B | length 72.4
  Top Layer w0.25: SW1.B@27.02,20.95 SW1.B@27.02,22.45 ; SW1.B@27.02,22.53 C4.B v1(27.02,40.9) ; v1(27.025,92.4) R2.A
  Bottom Layer w0.25: v1(27.02,40.9) 27.023,40.902 27.023,92.398 v1(27.025,92.4)
NetC5_A: C5.A R5.B SW2.A | length 58.5
  Top Layer w0.25: SW2.A@60.3,20.95 60.3,22.45 v1(60.3,25.7) ; v1(60.3,78.125) R5.B
  Bottom Layer w0.25: v1(60.3,25.7) v1(60.3,78.125)
NetC9_B: C9.B SW3.4 U3.1 U3.3 | length 20.2
  Top Layer w0.25: 17.128,70.085 17.128,68.677 17.894,67.91 20.335,67.91 20.61,68.185 U3.3
  Top Layer w0.65: SW3.4@7.35,70.085 17.128,70.085 C9.B U3.1
NetC11_B: C11.B R20.A SW4.B | length 5
  Top Layer w0.25: R20.A 40.615,4.425 42.075,4.425 SW4.B@42.1,4.45 ; SW4.B@42.1,2.95 SW4.B@42.1,4.45 ; C11.B SW4.B@42.1,4.45
NetC12_B: C12.B R21.A SW5.B | length 5.1
  Top Layer w0.25: R21.A 40.575,22.425 42.075,22.425 SW5.B@42.1,22.45 ; SW5.B@42.1,20.95 SW5.B@42.1,22.45 ; C12.B SW5.B@42.1,22.45
NetC13_B: C13.B R22.A SW6.B | length 5.1
  Top Layer w0.25: R22.A 40.575,13.475 42.075,13.475 SW6.B@42.1,13.45 ; SW6.B@42.1,11.95 SW6.B@42.1,13.45 ; C13.B SW6.B@42.1,13.45
NetC14_B: C14.B R23.A SW7.B | length 5.4
  Top Layer w0.25: R23.A SW7.B@32.6,13.45 ; SW7.B@32.6,11.95 SW7.B@32.6,13.45 ; C14.B SW7.B@32.6,13.45
NetC15_B: C15.B R24.A SW8.B | length 5.4
  Top Layer w0.25: R24.A@50.24,13.45 SW8.B@52.04,13.45 ; R24.A@50.32,13.45 R24.A@50.32,13.5 ; SW8.B@52.12,11.95 52.12,13.45 C15.B@52.12,15.5
NetC20_B: C20.B U5.3 U5.13 U5.14 | length 8.9
  Top Layer w0.25: C20.B U5.3 48.144,66.813 50.684,64.273 U5.14 U5.13
NetC22_B: C22.B J1.SHELL R29.B | length 9.5
  Top Layer w0.25: J1.SHELL@2.695,47.18 4.495,47.18 v1(4.525,47.15) ; J1.SHELL@2.695,55.82 v1(4.625,55.82) ; v1(4.2,60.525) 4.201,60.524 R29.B@4.201,59.649 ; C22.B@5.614,59.66 5.614,60.514 v1(5.625,60.525) ; J1.SHELL@6.875,47.18 8.647,47.18 v1(9.075,46.753) ; J1.SHELL@6.875,55.82 v1(6.875,57.4)
NetD1_A: D1.A R3.A | length 72.4
  Top Layer w0.25: D1.A@53.847,2.502 v1@53.847,3.748 ; v1@53.872,73.928 R3.A@53.872,75.023
  Bottom Layer w0.25: v1@53.847,3.752 v1@53.847,73.848
  other v1: 53.845,3.75 53.845,73.825
NetD2_A: D2.A R4.B | length 72.6
  Top Layer w0.25: D2.A v1(55.115,3.75) ; v1@55.12,73.83 R4.B@55.12,75.045
  Bottom Layer w0.25: v1@55.125,3.725 v1(55.125,73.825)
NetD3_B: D3.B R6.A | length 24.1
  Top Layer w0.25: D3.B 24.622,44.4 24.625,44.403 R6.A@34.947,44.403
NetD4_B: D4.B R8.A | length 24
  Top Layer w0.25: D4.B R8.A
NetD5_B: D5.B R9.A | length 24
  Top Layer w0.25: D5.B R9.A
NetDS1_3: DS1.3 U1.17 | length 50.7
  Top Layer w0.25: v1@44.977,78.092 U1.17@44.977,79.721
  Bottom Layer w0.25: DS1.3 45,36.36 v1(45,78.075)
NetDS1_4: DS1.4 U1.18 | length 50.2
  Top Layer w0.25: v1@46.213,78.092 U1.18@46.213,79.731
  Bottom Layer w0.25: DS1.4 42.33,31.515 42.721,31.906 42.721,31.921 46.225,35.425 v1@46.225,78.075
  other v1: 46.2,78.075
NetDS1_5: DS1.5 U1.19 | length 50
  Top Layer w0.25: v1@47.497,78.092 U1.19@47.497,79.741
  Bottom Layer w0.25: DS1.5 47.675,33.955 47.675,60.935 47.5,61.11 v1(47.5,78.075) v1@47.5,78.3
NetDS1_6: DS1.6 U1.20 | length 49.2
  Top Layer w0.25: v1@48.765,78.092 U1.20
  Bottom Layer w0.25: DS1.6 47.41,31.515 48.875,32.98 48.875,60.23 48.765,60.34 v1(48.765,78.075) v1@48.765,78.092
NetDS1_7: DS1.7 U1.21 | length 49
  Top Layer w0.25: DS1.7 DS1.7@50.143,31.343 ; v1@50.035,78.092 U1.21
  Bottom Layer w0.25: DS1.7 49.993,31.192 v1@49.993,78.258
  other v1: 50.035,78.075
NetDS1_8: DS1.8 U1.22 | length 49.1
  Top Layer w0.25: v1@51.302,78.092 U1.22@51.302,79.74 ; DS1.8 52.55,31.15 DS1.8@52.7,31.3
  Bottom Layer w0.25: v1(51.3,78.075) 51.3,55.138 51.35,55.088 51.35,32.29 DS1.8@52.34,31.3
NetJ1_A5: J1.A5 R28.B | length 27.5
  Top Layer w0.25: J1.A5 v1(10.075,52.75) ; v1(24.15,52.75) R28.B@34.9,52.75
  Bottom Layer w0.25: v1(10.075,52.75) v1(24.15,52.75)
NetJ1_B5: J1.B5 R27.B | length 28.1
  Top Layer w0.25: J1.B5 9.899,49.75 10.244,50.094 v1(10.325,50.094) ; v1(24.15,50.1) 24.171,50.1 25.371,51.3 R27.B
  Bottom Layer w0.25: v1@10.331,50.1 v1(24.15,50.1)
NetQ1_2: Q1.2 U1.39 | length 5.9
  Top Layer w0.25: U1.39 58.45,96.23 58.945,95.735 58.969,95.735 60.325,94.379 60.325,92.483 60.782,92.025 61.205,92.025 Q1.2
NetQ1_3: Q1.3 R18.B | length 6
  Top Layer w0.25: Q1.3 61.415,91.5 63.95,88.965 R18.B
NetQ1_4: Q1.4 Q1.5 R17.B | length 2.7
  Top Layer w0.25: Q1.5 Q1.4 R17.B
NetR3_B: R3.B U1.24 | length 3.2
  Top Layer w0.25: R3.B U1.24
NetR4_A: R4.A U1.25 | length 3.2
  Top Layer w0.25: R4.A U1.25
NetR5_A: R5.A U1.27 | length 2.4
  Top Layer w0.25: U1.27 R5.A@60.5,80.99
NetR6_B: R6.B U2.6 | length 3.7
  Top Layer w0.25: R6.B 37.054,44.4 37.954,43.5 U2.6
NetR7_A: R7.A R11.B U2.2 | length 9.7
  Top Layer w0.25: R11.B R7.A 39.625,48.5 42.35,45.775 U2.2 U2.2@42.325,44.575
NetR8_B: R8.B U2.7 | length 3.3
  Top Layer w0.25: R8.B U2.7
NetR9_B: R9.B U2.8 | length 3.7
  Top Layer w0.25: R9.B 37.056,41.6 37.956,42.5 U2.8
NetR10_A: R10.A U2.13 | length 7.7
  Top Layer w0.25: R10.A 39.7,36.9 41.85,39.05 U2.13
NetR12_B: R12.B U2.4 | length 6.3
  Top Layer w0.25: R12.B 39.338,47.1 41.325,45.113 41.325,44.575 U2.4
NetR13_A: R13.A U2.12 | length 6.2
  Top Layer w0.25: R13.A 39.9,38.3 41.35,39.75 U2.12
NetR14_A: R14.A U2.5 | length 5.1
  Top Layer w0.25: R14.A 40,45.7 40.85,44.85 U2.5
NetR15_B: R15.B U2.9 | length 4.1
  Top Layer w0.25: R15.B 37.086,40.2 38.886,42 U2.9
NetR16_B: R16.B U2.17 | length 5.3
  Top Layer w0.25: U2.17 R16.B
NetR18_A: R18.A R19.B U1.38 | length 11.2
  Top Layer w0.25: U1.38 58.475,94.635 58.799,94.635 59.875,93.559 59.875,88.225 60.762,87.338 60.762,86.778 60.811,86.73 62.42,86.73 R18.A
NetR20_B: R20.B U1.6 | length 96.6
  Top Layer w0.25: v1(29.212,40.9) 29.212,23.989 37.028,16.173 37.028,6.382 R20.B ; v1(38.9,91.15) U1.6
  Bottom Layer w0.25: v1(29.212,40.9) 29.212,81.462 v1(38.9,91.15)
NetR21_B: R21.B U1.9 | length 74.3
  Top Layer w0.25: v1(32.5,40.9) 32.5,25.198 35.298,22.4 R21.B ; v1(38.9,87.34) U1.9
  Bottom Layer w0.25: v1(32.5,40.9) 32.5,80.94 v1(38.9,87.34)
NetR22_B: R22.B U1.7 | length 85.3
  Top Layer w0.25: v1(30.308,40.9) 30.308,24.392 39.05,15.65 R22.B ; v1(38.9,89.88) U1.7
  Bottom Layer w0.25: v1(30.308,40.9) 30.308,81.288 v1(38.9,89.88)
NetR23_B: R23.B U1.5 | length 85.7
  Top Layer w0.25: v1(28.116,40.9) 28.116,23.586 29.3,22.402 R23.B ; v1(38.9,92.42) U1.5
  Bottom Layer w0.25: v1(28.116,40.9) 28.116,81.616 v1@38.91,92.41
NetR24_B: R24.B U1.8 | length 90.7
  Top Layer w0.25: v1(31.404,40.9) 31.404,24.795 38.499,17.7 44.54,17.7 48.415,13.825 48.515,13.825 48.74,13.6 R24.B ; v1(38.9,88.61) U1.8
  Bottom Layer w0.25: v1(31.404,40.9) 31.404,81.114 v1(38.9,88.61)
NetU1_11: U1.11 U4.4 | length 24.2
  Top Layer w0.25: U4.4 19.31,84.8 U1.11
NetU1_12: U1.12 U4.3 | length 24.7
  Top Layer w0.25: U4.3 20.58,83.53 U1.12
NetU1_36: U1.36 U5.20 | length 30.2
  Top Layer w0.25: U5.20 v1(56.313,68.083) ; v1(56.3,92.4) U1.36@58.13,92.4
  Bottom Layer w0.25: v1(56.313,68.083) v1@56.313,92.393
NetU1_37: U1.37 U5.4 | length 37.6
  Top Layer w0.25: v1(43.525,66.178) 43.565,66.137 U5.4@46.465,66.137 ; v1@56.305,93.695 U1.37@58.15,93.695
  Bottom Layer w0.25: v1(43.525,66.178) 43.525,80.925 v1(56.3,93.7)
V_Bat: B1.+ C8.A Q1.6 R17.A U2.14 U2.15 U2.16 | length 85.1
  Top Layer w0.25: v1@42.862,36.662 v1@64.662,36.662 ; Q1.6 63.387,91.5 63.84,91.048 64.617,91.048 R17.A 64.682,90.982 64.682,89.818 v1(64.7,89.8)
  Top Layer w0.3: U2.14 U2.15 ; C8.A U2.15 ; U2.16 43.9,40.925 43.425,40.45 U2.15
  Top Layer w0.5: v1(42.825,36.625) C8.A@42.825,38.7
  Bottom Layer w0.25: B1.+@8,33 cw(c8.3,33) B1.+ ; v1(64.7,36.7) v1(64.7,89.8)
  other v1: 4.5,29.6 8.3,29.6 12.1,29.6 4.5,37 8.3,37 12.1,37
V_Charger: C6.B SW3.5 U2.1 U2.20 | length 52.9
  Top Layer w0.3: U2.1 42.85,45.9 C6.B 44.15,43.5 U2.20
  Top Layer w0.6: SW3.5@7.413,67.563 11.288,67.563 12.625,66.225 26.975,66.225 v1(33.225,59.975) ; C6.B v1(44.15,48.75)
  Bottom Layer w0.6: v1(33.225,59.975) 44.15,49.05 v1(44.15,48.75)
VBUS: C7.B C16.B C17.B D3.A D4.A D5.A FB1.B R7.B R12.A R15.A R16.A U2.18 U2.19 U5.15 | length 23
  Top Layer w0.25: v1(8.3,43) D4.A ; v1(9,44.3) 9,44.761 10.121,45.883 D3.A@10.783,45.883 ; v1(9.15,41.725) 9.15,40.8 9.85,40.1 D5.A ; v1(33.775,48.5) R7.B ; v1(33.8,47.1) R12.A ; v1(33.844,40.2) R15.A ; U2.18 45.375,42.5 45.6,42.725 C7.B ; C7.B@45.425,42.975 C7.B ; v1(46.975,44.3) 46.975,44.275 45.6,42.9 C7.B ; v1(50.75,40.675) R16.A ; U5.15 C16.B C17.B v1(57.425,64.908)
  Top Layer w0.5: FB1.B 13.911,47.6 13.936,47.575 v1(13.95,47.575)
VUSB: C21.B FB1.A J1.A4 J1.B4 | length 10.8
  Top Layer w0.5: J1.B4 v1(8.95,49.1) C21.B FB1.A@12,49.1 ; J1.A4 v1(8.95,53.9)
  Int2 (PWR) w0.5: v1(8.95,49.1) v1(8.95,53.9)
pads on no net: DS1.X J1.36 J1.A8 J1.B8 SW3.1 SW3.2 SW3.3 SW3.6 U1.4 U1.10 U1.15 U1.16 U1.23 U1.26 U1.28 U1.29 U1.30 U1.31 U1.32 U1.33 U1.34 U1.35 U3.4 U4.5 U4.6 U4.7 U4.8 U4.9 U4.10 U5.1 U5.2 U5.5 U5.7 U5.8 U5.9 U5.10 U5.17 U5.18 U5.19
copper on no net:
  other v2: 24.256,29.437 62.556,29.437 25.3,29.65 63.6,29.65 63.6,29.65 23.286,29.878 61.586,29.878 26.019,30.436 64.319,30.436 22.761,30.805 61.061,30.805 26.139,31.495 64.439,31.495 22.881,31.864 61.181,31.864 25.614,32.422 63.914,32.422 23.6,32.65 23.6,32.65 61.9,32.65 24.644,32.863 62.944,32.863 24.795,94.961 62.945,94.961 23.736,95.081 61.886,95.081 25.722,95.486 63.872,95.486 22.95,95.8 61.1,95.8 26.163,96.456 64.313,96.456 22.737,96.844 60.887,96.844 25.95,97.5 25.95,97.5 64.1,97.5 64.1,97.5 23.178,97.814 61.328,97.814 25.164,98.219 63.314,98.219 24.105,98.339 62.255,98.339

## Polygon pours and split planes (outlines as drawn)
VBUS on Int2 (PWR) "VBUS_L03_P034" (solid, remove dead copper, pour order 34): 0,3 0,97 cw(c3,97) 3,100 63,100 cw(c63,97) 66,97 66,3 cw(c63,3) 63,0 3,0 cw(c3,3)
+3V3 on Int2 (PWR) "Int2 (PWR)-+3V3" (solid, pour order 10): 40.561,94 ccw(c40.561,95.957) 42.517,95.957 42.517,97 42.509,100 0,100 0,0 38.5,0 38.5,28.1 3,28.1 3,61.7 26.825,61.7 ccw(c26.825,63.4) 28.525,63.4 28.525,77.85 28.525,91.8 cw(c30.725,91.8) 30.725,94 35.525,94
NetC22_B on Int2 (PWR) "NETC22_B_L03_P015" (solid, pour order 15): 0.075,45.819 0.075,62.744 13,62.744 13,53.269 13,46.769 cw(c12.05,46.769) 12.05,45.819
V_Bat on Int2 (PWR) "V_BAT_L03_P023" (solid, pour order 23): 40.275,35.5 ccw(c40.275,33.725) 38.5,33.725 38.5,28.35 2.075,28.35 2.075,39.1 23.837,39.1 43.8,39.1 cw(c43.8,37.3) 45.6,37.3 cw(c43.8,37.3) 43.8,35.5 42.05,35.5
GND on Bottom Layer "NONET_L04_P035" (solid, remove dead copper, shelved, pour order 35): 0,3 0,97 cw(c3,97) 3,100 63,100 cw(c63,97) 66,97 66,3 cw(c63,3) 63,0 3,0 cw(c3,3)
GND on Int1 (GND) "GND_L02_P033" (solid, remove dead copper, pour order 33): 0,3 0,97 cw(c3,97) 3,100 63,100 cw(c63,97) 66,97 66,3 cw(c63,3) 63,0 3,0 cw(c3,3)
GND on Top Layer "GND_L01_P032" (solid, remove dead copper, pour order 32): 0,3 0,97 cw(c3,97) 3,100 63,100 cw(c63,97) 66,97 66,3 cw(c63,3) 63,0 3,0 cw(c3,3)

## Other copper
Bottom Layer:
  region net GND: 12.1,18.475 ccw(c12.1,19.675) 13.3,19.675 13.3,26.925 ccw(c12.1,26.925) 12.1,28.125 4.5,28.125 ccw(c4.5,26.925) 3.3,26.925 3.3,19.675 ccw(c4.5,19.675) 4.5,18.475 8.3,18.475
  region net V_Bat: 12.1,28.475 ccw(c12.1,29.675) 13.3,29.675 13.3,36.925 ccw(c12.1,36.925) 12.1,38.125 4.5,38.125 ccw(c4.5,36.925) 3.3,36.925 3.3,29.675 ccw(c4.5,29.675) 4.5,28.475 8.3,28.475

## Silkscreen, mask and mechanical layers (free items; w line width, h text height)
Top Overlay:
  text "ON" at 0.529,72.304 h1.52
  text "UART" at 16.054,63.204 h1.52
  text "USB" at 9.329,63.104 h1.52
  text "OFF" at 0.304,61.054 h1.52
  text "PG" at 5.843,44.564 h1.3
  text "Charge status" at 0.225,42.669 h1.3
  text "Low Battery" at 1.318,40.594 h1.3
  text "Boot" at 59.154,25.754 h1.52
  text "Reset" at 22.854,25.654 h1.52
  text "Indoor Localization Unit" at 1.729,8.454 h1.52
  text "Syntronic 2024" at 1.729,4.95 h1.52
  text "Scan" at 47.554,3.454 h1.52
  text "Power" at 57.369,3.454 h1.52
  text "Christian Khederchah" at 1.729,1.954 h1.52
Mechanical 1:
  the board outline again, w0.1